# Altium PCB pcbxiao.PcbDoc (part 1 of 3)
Units mil, origin at the board's own origin, x right, y up, seen from the top; angles counter-clockwise.
Board outline 4666.32 x 1182.42 mil, 4 copper layers (Top Layer, Mid-Layer 1, Mid-Layer 2, Bottom Layer); 288 components, 144 nets, 734 pads, 278 vias.
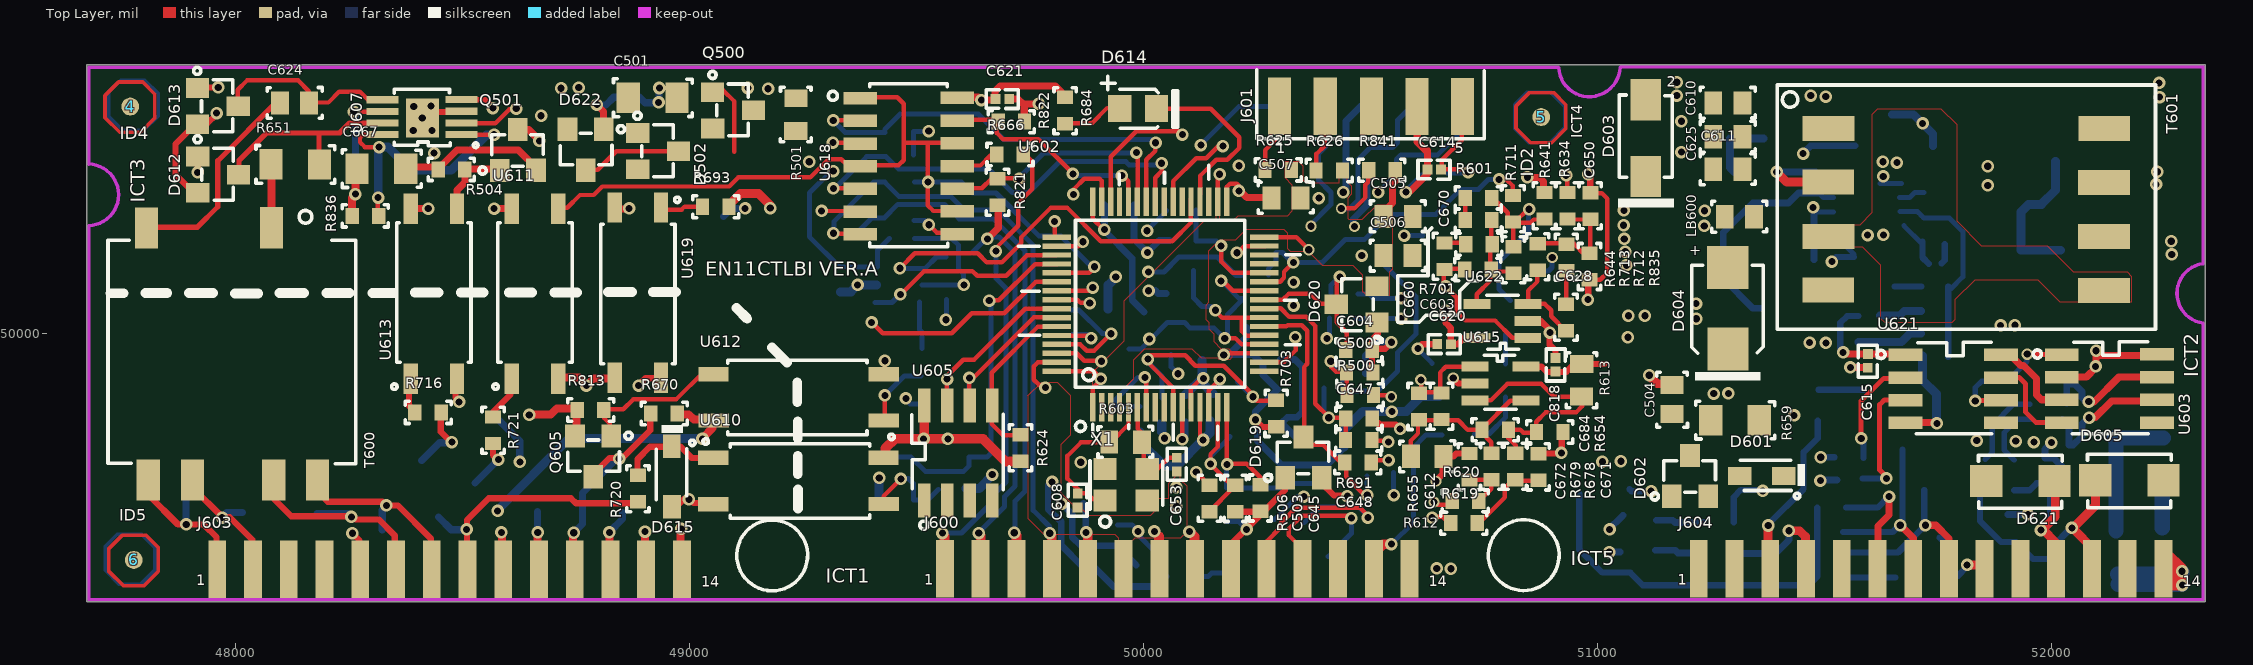
[diagram p0: Top Layer view]
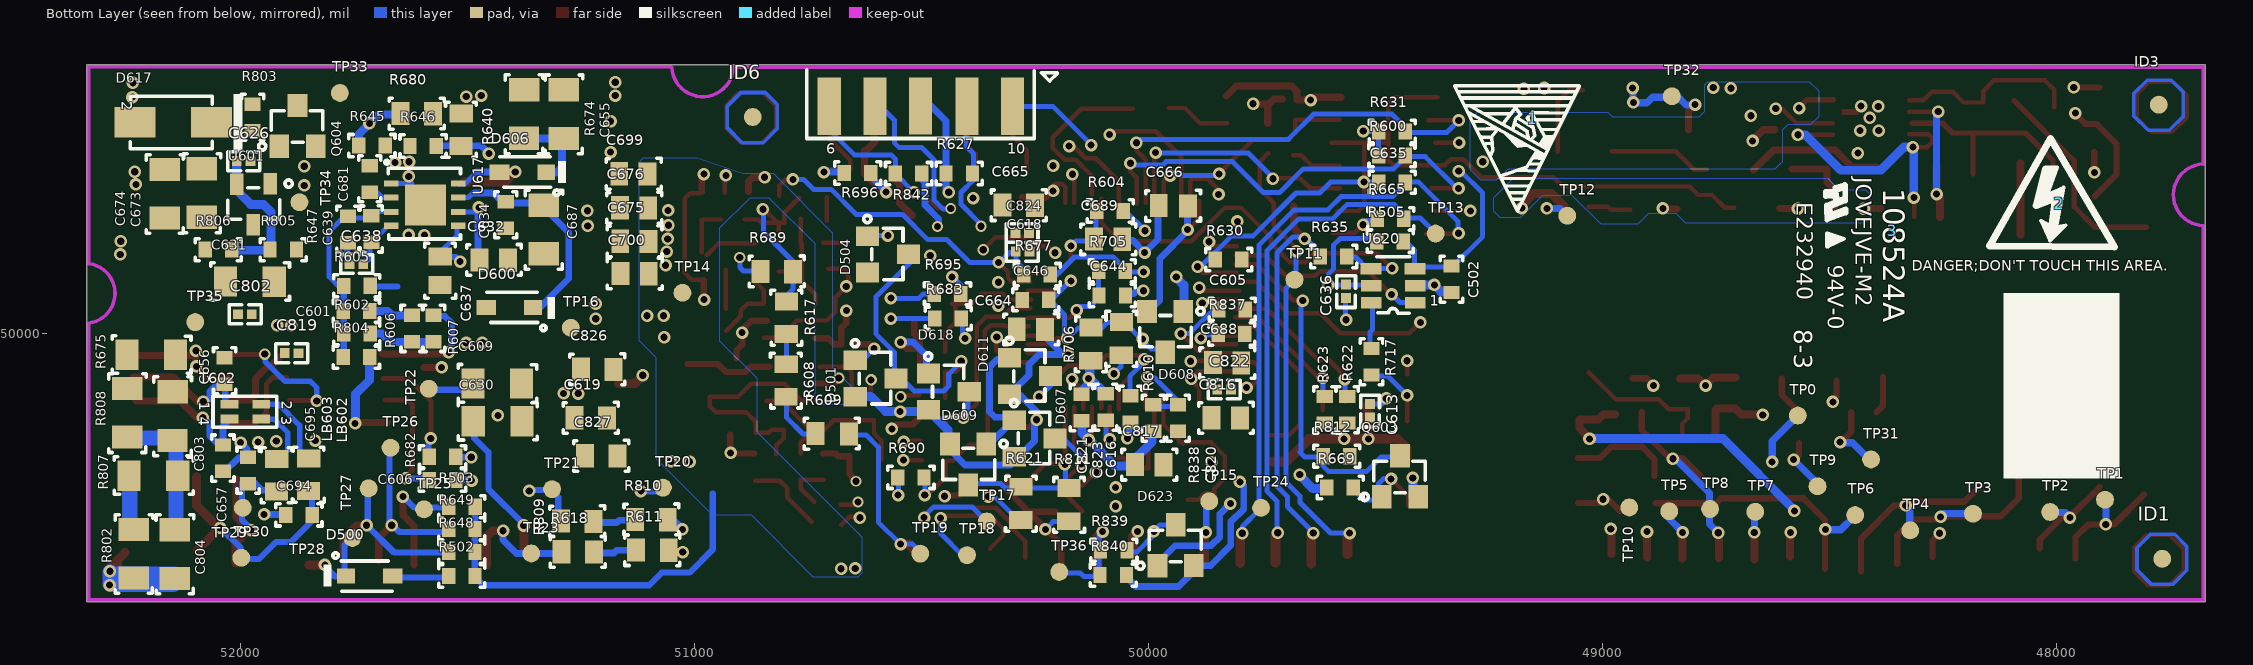
[diagram p1: Bottom Layer view, seen from below]
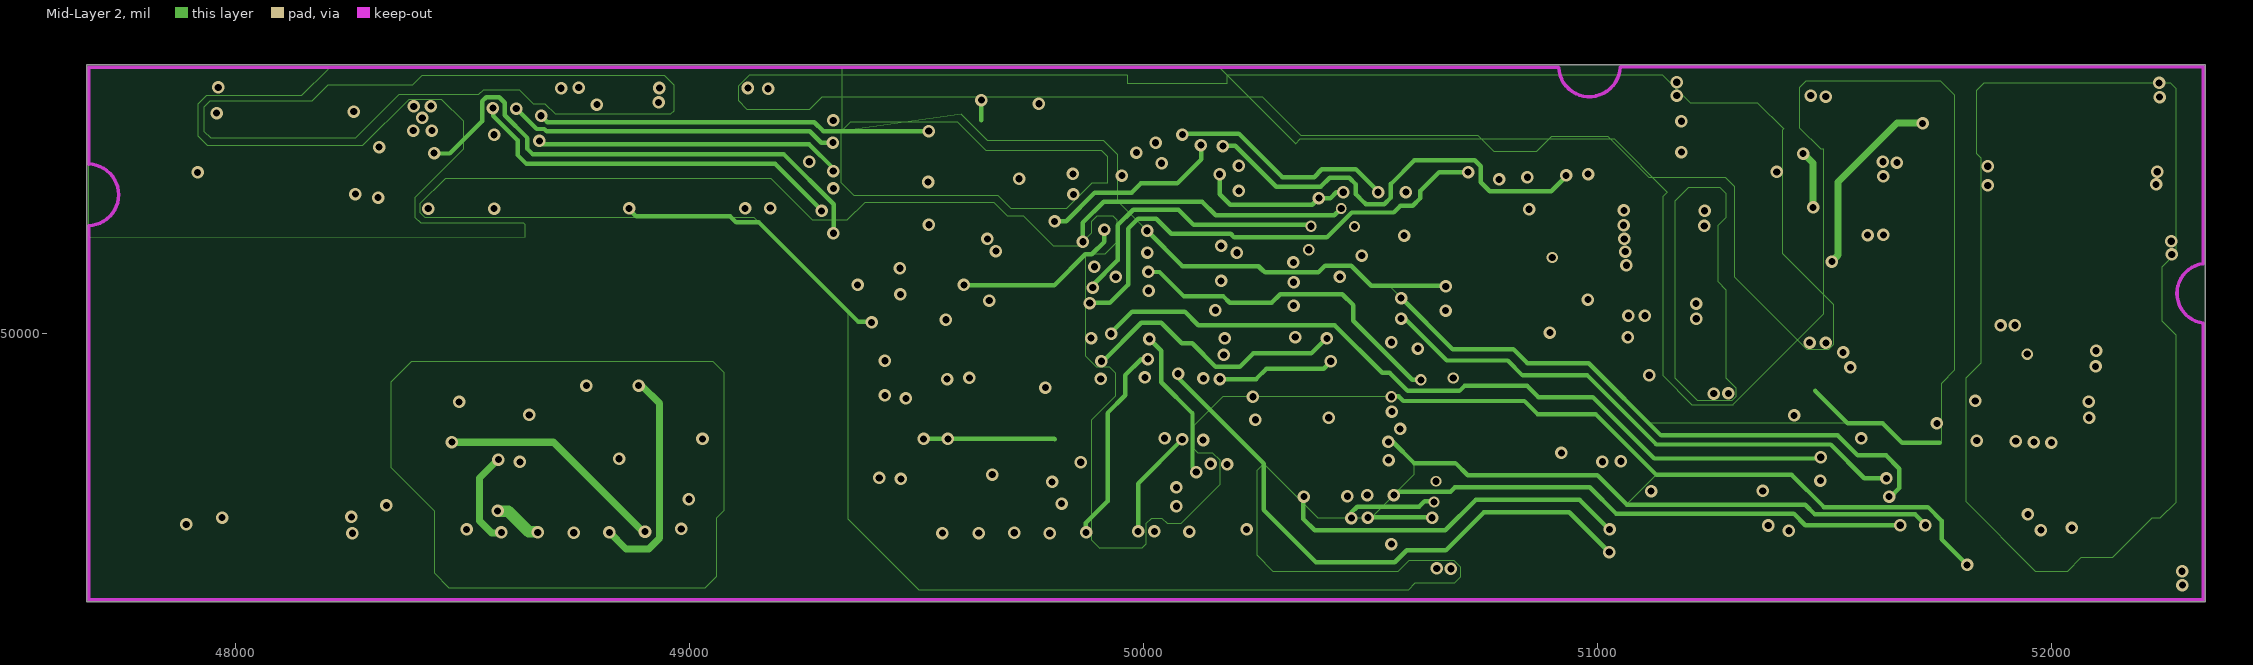
[diagram p2: Mid-Layer 2]

## Layer stack, top to bottom
Top Solder: solder mask 0.4, Solder Resist, Dk 3.5
Top Layer: signal copper 1.4
Dielectric 1: dielectric 12.6, FR-4, Dk 4.8
Mid-Layer 1: signal copper 1.4
Dielectric3: dielectric 12.6, FR-4, Dk 4.8
Mid-Layer 2: signal copper 1.4
Dielectric2: dielectric 12.6, FR-4, Dk 4.8
Bottom Layer: signal copper 1.4
Bottom Solder: solder mask 0.4, Solder Resist, Dk 3.5

## Board outline
47672.33,49408.87 52338.65,49408.87 52338.65,50591.29 47672.33,50591.29

## Design rules (kind name [scope] priority, off if disabled: settings)
AssemblyTestPointUsage [All] p0: scope1count=1 scope1_0_kind=Board scope1_0_value=Board scope2count=1 scope2_0_kind=Board scope2_0_value=Board commentlength=0
AssemblyTestpoint [All] p0: scope1count=1 scope1_0_kind=Board scope1_0_value=Board scope2count=1 scope2_0_kind=Board scope2_0_value=Board commentlength=0
Clearance [All] p0: scope1count=1 scope1_0_kind=Board scope1_0_value=Board scope2count=1 scope2_0_kind=Board scope2_0_value=Board commentlength=0 gap=12
Clearance [All] p1: gap=12 ignorepadtopadclearanceinfootprint=FALSE
ComponentClearance [All] p0: scope1count=1 scope1_0_kind=Board scope1_0_value=Board scope2count=1 scope2_0_kind=Board scope2_0_value=Board commentlength=0 gap=10 collisioncheckmode=3
DiffPairsRouting [All] p0: scope1count=1 scope1_0_kind=Board scope1_0_value=Board scope2count=1 scope2_0_kind=Board scope2_0_value=Board commentlength=0
FabricationTestPointUsage [All] p0: scope1count=1 scope1_0_kind=Board scope1_0_value=Board scope2count=1 scope2_0_kind=Board scope2_0_value=Board commentlength=0 valid=0 allowmultiple=FALSE
FabricationTestpoint [All] p0: scope1count=1 scope1_0_kind=Board scope1_0_value=Board scope2count=1 scope2_0_kind=Board scope2_0_value=Board commentlength=0 side=3 testpointundercomponent=TRUE minsize=40 maxsize=100 preferedsize=60 minholesize=0 maxholesize=40 preferedholesize=32 testpointgrid=1
FanoutControl Fanout_BGA [All] p0 off: scope1count=1 scope1_0_kind=Board scope1_0_value=Board scope2count=1 scope2_0_kind=Board scope2_0_value=Board commentlength=69 // Protel DXP Scope 1 Expression Was: IsBGA   Fanout_BGA (Default Rule)
FanoutControl Fanout_LCC [All] p0 off: scope1count=1 scope1_0_kind=Board scope1_0_value=Board scope2count=1 scope2_0_kind=Board scope2_0_value=Board commentlength=69 // Protel DXP Scope 1 Expression Was: IsLCC   Fanout_LCC (Default Rule)
FanoutControl Fanout_SOIC [All] p0 off: scope1count=1 scope1_0_kind=Board scope1_0_value=Board scope2count=1 scope2_0_kind=Board scope2_0_value=Board commentlength=71 // Protel DXP Scope 1 Expression Was: IsSOIC   Fanout_SOIC (Default Rule)
FanoutControl Fanout_Small [All] p0 off: scope1count=1 scope1_0_kind=Board scope1_0_value=Board scope2count=1 scope2_0_kind=Board scope2_0_value=Board commentlength=84 // Protel DXP Scope 1 Expression Was: (CompPinCount < 5)   Fanout_Small (Default Rule)
FanoutControl Fanout_Default [All] p0: scope1count=1 scope1_0_kind=Board scope1_0_value=Board scope2count=1 scope2_0_kind=Board scope2_0_value=Board commentlength=30 // Fanout_Default (Default Rule)
Height [All] p0: scope1count=1 scope1_0_kind=Board scope1_0_value=Board scope2count=1 scope2_0_kind=Board scope2_0_value=Board commentlength=0
HoleSize [All] p0: scope1count=1 scope1_0_kind=Board scope1_0_value=Board scope2count=1 scope2_0_kind=Board scope2_0_value=Board commentlength=0 absolutevalues=TRUE maxlimit=100 minlimit=1 maxpercent=80.000 minpercent=20.000
HoleToHoleClearance [All] p0: scope1count=1 scope1_0_kind=Board scope1_0_value=Board scope2count=1 scope2_0_kind=Board scope2_0_value=Board commentlength=0
LayerPairs [All] p0: scope1count=1 scope1_0_kind=Board scope1_0_value=Board scope2count=1 scope2_0_kind=Board scope2_0_value=Board commentlength=0 enforce=TRUE
MinimumSolderMaskSliver [All] p0: scope1count=1 scope1_0_kind=Board scope1_0_value=Board scope2count=1 scope2_0_kind=Board scope2_0_value=Board commentlength=0
NetAntennae [All] p0: scope1count=1 scope1_0_kind=Board scope1_0_value=Board scope2count=1 scope2_0_kind=Board scope2_0_value=Board commentlength=0
PasteMaskExpansion [All] p0: scope1count=1 scope1_0_kind=Board scope1_0_value=Board scope2count=1 scope2_0_kind=Board scope2_0_value=Board commentlength=0 expansion=0
PlaneClearance [All] p0: scope1count=1 scope1_0_kind=Board scope1_0_value=Board scope2count=1 scope2_0_kind=Board scope2_0_value=Board commentlength=0 clearance=20
PlaneConnect [All] p0: scope1count=1 scope1_0_kind=Board scope1_0_value=Board scope2count=1 scope2_0_kind=Board scope2_0_value=Board commentlength=0 planeconnectstyle=Relief reliefexpansion=20 reliefentries=4 reliefconductorwidth=10 reliefairgap=10
PolygonConnect [All] p0: scope1count=1 scope1_0_kind=Board scope1_0_value=Board scope2count=1 scope2_0_kind=Board scope2_0_value=Board commentlength=0 connectstyle=Direct reliefconductorwidth=10 reliefentries=4 polygonreliefangle="90 Angle"
PolygonConnect [All] p1: connectstyle=Direct reliefconductorwidth=10 reliefentries=4 polygonreliefangle="90 Angle" airgapwidth=10
RoutingCorners [All] p0: scope1count=1 scope1_0_kind=Board scope1_0_value=Board scope2count=1 scope2_0_kind=Board scope2_0_value=Board commentlength=0 cornerstyle=45-Degree minsetback=100 maxsetback=100
RoutingLayers [All] p0: scope1count=1 scope1_0_kind=Board scope1_0_value=Board scope2count=1 scope2_0_kind=Board scope2_0_value=Board commentlength=0 top layer=Automatic mid layer 1=Automatic mid layer 2=Automatic bottom layer=Automatic
RoutingLayers [All] p1: top layer_v5=TRUE mid layer 1_v5=FALSE mid layer 2_v5=FALSE bottom layer_v5=TRUE
RoutingPriority [All] p0: scope1count=1 scope1_0_kind=Board scope1_0_value=Board scope2count=1 scope2_0_kind=Board scope2_0_value=Board commentlength=0
RoutingTopology [All] p0: scope1count=1 scope1_0_kind=Board scope1_0_value=Board scope2count=1 scope2_0_kind=Board scope2_0_value=Board commentlength=0 topology=Shortest
RoutingVias [All] p0: scope1count=1 scope1_0_kind=Board scope1_0_value=Board scope2count=1 scope2_0_kind=Board scope2_0_value=Board commentlength=0 holewidth=28 width=50 viastyle="Through Hole" minholewidth=28 minwidth=50 maxholewidth=28 maxwidth=50
RoutingVias [All] p1: holewidth=28 width=50 viastyle="Through Hole" minholewidth=28 minwidth=50 maxholewidth=28 maxwidth=50
ShortCircuit [All] p0: scope1count=1 scope1_0_kind=Board scope1_0_value=Board scope2count=1 scope2_0_kind=Board scope2_0_value=Board commentlength=0 allowed=FALSE
SilkToBoardRegionClearance [All] p0: scope1count=1 scope1_0_kind=Board scope1_0_value=Board scope2count=1 scope2_0_kind=Board scope2_0_value=Board commentlength=0
SilkToSilkClearance [All] p0: scope1count=1 scope1_0_kind=Board scope1_0_value=Board scope2count=1 scope2_0_kind=Board scope2_0_value=Board commentlength=0
SilkToSolderMaskClearance [All] p0 off: scope1count=1 scope1_0_kind=Board scope1_0_value=Board scope2count=1 scope2_0_kind=Board scope2_0_value=Board commentlength=44 // Protel DXP Scope 1 Expression Was: IsPad
SolderMaskExpansion [All] p0: scope1count=1 scope1_0_kind=Board scope1_0_value=Board scope2count=1 scope2_0_kind=Board scope2_0_value=Board commentlength=0 expansion=2
SolderMaskExpansion [All] p1: expansion=2 istentingtop=FALSE
UnRoutedNet [All] p0: scope1count=1 scope1_0_kind=Board scope1_0_value=Board scope2count=1 scope2_0_kind=Board scope2_0_value=Board commentlength=0
UnpouredPolygon [All] p0: scope1count=1 scope1_0_kind=Board scope1_0_value=Board scope2count=1 scope2_0_kind=Board scope2_0_value=Board commentlength=0
Width [All] p0: scope1count=1 scope1_0_kind=Board scope1_0_value=Board scope2count=1 scope2_0_kind=Board scope2_0_value=Board commentlength=0 maxlimit=10 minlimit=10 preferedwidth=10
Width [All] p1: maxlimit=10 minlimit=10 preferedwidth=10
29 further rules are at their usual default settings.

## Components (designator, comment, footprint, x,y, rotation, side; value= is the part's Value field where it differs from the comment)
1 "NC" 27 49153.33,50472.5 r0 bottom
2 "NC" 28 47994.17,50285 r0 bottom
3 "NC" 29 48362,50226 r0 bottom
4 "NC" 30#1 47767.35,50495.91 r0 top
5 "NC" 30#2 50875.53,50472.73 r0 top
6 "NC" 30#3 47775.07,49497.16 r0 top
C500 "10NF" 33 50442.73,49914.47 r90 top
C501 "10UF" 4 48870.61,50523.64 r90 top
C502 "NC" 33 49333.33,50085.42 r0 bottom
C503 "22NF" 33 50202.88,49669.24 r0 top
C504 "1UF" 3 51171.48,49888.22 r0 top
C505 "NC" 3 50595.12,50250.3 r270 top
C506 "10UF" 3 50594.7,50164.05 r270 top
C507 "NC" 3 50348.03,50291.14 r270 top
C601 "22NF" 33 51777.92,50050 r90 bottom
C603 "NC" 33 50703.03,50141.14 r90 top
C604 "2.2NF" 33 50441.48,49964.05 r90 top
C605 "41PF" 33 49782.42,50051.92 r270 bottom
C606 "41PF" 33 51588.33,49677.5 r90 bottom
C608 "22PF" 14#1 49857.31,49641.14 r0 top
C609 "10UF" 4 51482.69,49894.47 r90 bottom
C610 "1UF" 3 51321.33,50500.27 r270 top
C611 "1UF" 3 51321.33,50354.43 r270 top
C612 "33PF" 33 50657.2,49872.8 r0 top
C613 "100NF" 14#2 49514.58,49819.67 r180 bottom
C614 "100NF" 14#1 50630.95,50363.22 r90 top
C615 "100NF" 14#1 51593.15,49929.47 r180 top
C616 "1UF" 33 50040.42,49799.58 r0 bottom
C618 "100NF" 14#2 50286.67,50182.08 r270 bottom
C619 "1UF" 32#1 51261.67,49805.83 r90 bottom
C620 "NC" 14#1 50671.78,49973.64 r270 top
C621 "100NF" 14#1 49679.61,50518.64 r90 top
C624 "2.2UF" 3 48095.61,50514.47 r90 top
C625 "1UF" 3 51321.33,50425.68 r270 top
C626 "100NF" 14#2 51983.83,50376.67 r90 bottom
C628 "10NF" 33 50931.78,50068.64 r0 top
C630 "10UF" 4 51481.86,49811.14 r90 bottom
C631 "10UF" 4 52027.69,50119.05 r90 bottom
C632 "1UF" 32#2 51474.75,50153.75 r90 bottom
C634 "100NF" 33 51415,50294.17 r180 bottom
C635 "10NF" 33 49430,50331.67 r270 bottom
C636 "100NF" 14#2 49567.5,50082.92 r180 bottom
C637 "330NF" 32#2 51567.92,50170.58 r180 bottom
C638 "33NF" 14#2 51735.42,50150 r90 bottom
C639 "2.2NF" 33 51711.25,50262.92 r180 bottom
C644 "22NF" 33 50046.25,50082.5 r270 bottom
C645 "22NF" 33 50258.15,49670.3 r0 top
C646 "10NF" 33 50215,50072.92 r270 bottom
C647 "22NF" 33 50441.48,49813.22 r90 top
C648 "22NF" 33 50438.98,49716.14 r90 top
C650 "100NF" 33 50985.12,50314.05 r0 top
C653 "22PF" 14#1 50075.65,49720.3 r0 top
C655 "1NF" 4 51283.03,50530.8 r180 bottom
C656 "10PF" 33 52034.17,49950.83 r180 bottom
C657 "10PF" 33 52038.12,49758.33 r180 bottom
C660 "2.2NF" 33 50662.2,50136.14 r180 top
C664 "2.2UF" 32#2 50291.67,50001.08 r90 bottom
C665 "2.2UF" 32#1 50318.75,50274.58 r90 bottom
C666 "2.2UF" 32#3 49978.92,50273.33 r90 bottom
C667 "10UF" 4 48273.11,50367.39 r90 top
C670 "10NF" 33 50704.28,50250.72 r90 top
C671 "10NF" 33 50870.53,49738.64 r0 top
C672 "10NF" 33 50718.87,49739.47 r0 top
C673 "10UF" 4 52080.53,50357.05 r180 bottom
C674 "10UF" 4 52161.78,50355.38 r180 bottom
C675 "10UF" 32#2 51165.17,50194.58 r90 bottom
C676 "10UF" 32#2 51166,50268.75 r90 bottom
C681 "420PF" 33 51714.58,50373.33 r180 bottom
C684 "10NF" 33 50741.21,49788.22 r90 top
C687 "10UF" 4 51326.78,50276.63 r180 bottom
C688 "2.2UF" 32#2 49859.75,49927.5 r90 bottom
C689 "330NF" 32#2 50121.83,50199.58 r90 bottom
C694 "180PF" 33 51904.58,49600.83 r90 bottom
C695 "180PF" 33 51982.5,49731.67 r180 bottom
C699 "10UF" 32#2 51167.25,50343.33 r90 bottom
C700 "10UF" 32#2 51164.75,50123.75 r90 bottom
C802 "100NF" 14#2 51980.83,50039.58 r90 bottom
C803 "4.2NF" 4 52144.83,49865.67 r180 bottom
C804 "4.2NF" 4 52140.11,49561.63 r180 bottom
C816 "10UF" 32#2 49862.25,49805.83 r90 bottom
C817 "10UF" 32#2 50031.25,49702.92 r90 bottom
C818 "100NF" 14#1 50905.12,49921.14 r180 top
C819 "100NF" 14#2 51877.92,49953.75 r90 bottom
C820 "100NF" 33 49935.83,49779.58 r0 bottom
C821 "10NF" 33 50148.33,49802.92 r0 bottom
C822 "100NF" 14#2 49823.75,49873.75 r90 bottom
C823 "4.7NF" 33 50095,49804.17 r0 bottom
C824 "100NF" 14#2 50287.5,50223.33 r270 bottom
C826 "1UF" 32#1 51247.08,49912.92 r90 bottom
C827 "1UF" 32#1 51238.75,49722.5 r90 bottom
D500 "LBAS20HT1G(JR)" 18#1 51771.67,49467.08 r270 bottom
D501 "BAV99（A7）" 31#1 50558,49909 r90 bottom
D502 "BZX84C6V8(Z5)" 31#2 48973.79,50409.89 r270 top
D504 "NC" 31#1 50530.83,50182.5 r90 bottom
D600 "LBAS20HT1G(JR)" 18#1 51352.08,50055 r90 bottom
D601 "LBAS20HT1G(JR)" 18#2 51420.65,49684.85 r270 top
D602 "BAV99（A7）" 31#2 51195.23,49729.06 r0 top
D603 "SS510A" 16 51110.53,50511.14 r0 top
D604 "EF240" 17 51286.9,50122.8 r0 top
D605 "SMAJ220A(GE)" 19 52108.26,49684.62 r90 top
D606 "LBAS20HT1G(JR)" 18#1 51323,50352.92 r90 bottom
D607 "BAV99（A7）" 31#1 50207.83,49777.08 r90 bottom
D608 "BAV99（A7）" 31#1 49954.67,49960 r180 bottom
D609 "BAV99（A7）" 31#1 50388.33,49667.92 r180 bottom
D611 "BAV99（A7）" 31#1 50217.92,49914.58 r90 bottom
D612 "BAV99（A7）" 31#2 48004.77,50358.22 r270 top
D613 "BAV99（A7）" 31#2 48004,50509 r270 top
D614 "LED绿色" 10 50028.56,50491.33 r0 top
D615 "SD103BW（S5）" 18#3 48962.69,49739.47 r0 top
D617 "SS510A" 16 52229.58,50468.75 r90 bottom
D618 "BAV99（A7）" 31#1 50396.67,49880 r90 bottom
D619 "BAV99（A7）" 31#2 50343.56,49769.89 r0 top
D620 "BAV99（A7）" 31#2 50426.48,50054.89 r90 top
D621 "SMAJ220A(GE)" 19 51868.15,49682.8 r90 top
D622 "NC" 31#2 48779.85,50361.14 r180 top
D623 "BAV99（A7）" 31#1 49948.75,49576.25 r0 bottom
ID1 "MARK" 30#4 47767.5,49499.58 r0 bottom
ID3 "MARK" 30#4 47775,50500 r0 bottom
ID6 "MARK" 30#4 50872.5,50472.92 r0 bottom
J600 "14P单排针" 21 49560.69,49478.64 r0 top
J601 "NC" 25 50302.73,50496.14 r0 top
J603 "14P单排针" 21 47957.8,49477.8 r0 top
J604 "14P单排针" 21 51221.29,49478.64 r0 top
LB600 "680NH" 3 51346.78,50249.47 r270 top
LB602 "680NH" 32#1 51857.88,49721.29 r180 bottom
LB603 "680NH" 32#1 51928.33,49720.42 r180 bottom
Q500 "MMBT4401(2X)" 31#2 49138.94,50499.89 r270 top
Q501 "NC" 31#2 48613.11,50446.97 r0 top
Q603 "MMBT4401(2X)" 31#1 49454.75,49728.12 r0 bottom
Q604 "MMBT4401(2X)" 31#1 51883.33,50500 r0 bottom
Q605 "MMBT4401(2X)" 31#2 48796.44,49685.72 r180 top
R500 "30.1K±1%" 33 50443.98,49864.89 r90 top
R501 "1.5K" 32#1 49226.44,50514.89 r0 top
R502 "220K" 33 51546.25,49466.25 r90 bottom
R503 "30.1K±1%" 33 51545.83,49618.75 r90 bottom
R504 "NC" 33 48441.86,50361.97 r90 top
R505 "NC" 33 49434.08,50201.67 r270 bottom
R506 "1.96K±1%" 33 50146.48,49669.47 r0 top
R600 "5.1K" 33 49430.42,50390.42 r270 bottom
R601 "0R" 33 50704.28,50299.05 r90 top
R602 "3.3K" 33 51777.08,50000 r90 bottom
R603 "NC" 32#1 49927.31,49752.8 r90 top
R604 "NC" 33 50050.83,50268.33 r270 bottom
R605 "10K" 33 51777.5,50105.42 r90 bottom
R606 "402R±1%" 33 51621.25,50043.75 r180 bottom
R607 "0R" 33 51574.25,50043.75 r180 bottom
R608 "24K" 32#1 50790.83,49862.92 r0 bottom
R609 "24K" 32#4 50664.42,49786.25 r270 bottom
R610 "3.32K" 32#4 50067.5,50020.58 r180 bottom
R611 "10K" 32#1 51125.83,49514.58 r90 bottom
R612 "2.2M" 32#1 50592.2,49721.14 r90 top
R613 "2.2M" 32#1 50972.62,49863.64 r180 top
R617 "3.9K" 32#1 50790,50001.25 r0 bottom
R618 "91K" 32#1 51290.42,49510.83 r90 bottom
R619 "1K" 33 50672.31,49582.8 r90 top
R620 "1K" 33 50675.95,49631.14 r90 top
R621 "3.32K" 32#4 50288.75,49657.67 r180 bottom
R622 "10K" 33 49562.92,49797.92 r0 bottom
R623 "10K" 33 49612.5,49797.92 r0 bottom
R624 "10K" 33 49729.81,49780.72 r0 top
R625 "10K" 33 50263.26,50360.91 r90 top
R626 "10K" 33 50375.65,50359.47 r90 top
R627 "10K" 33 50383.33,50351.25 r270 bottom
R630 "10K" 33 49790,50161.25 r270 bottom
R631 "5.1K" 33 49430,50443.75 r270 bottom
R634 "150K±0.5%" 33 50934.7,50314.47 r0 top
R635 "10K" 33 49558.75,50168.33 r270 bottom
R640 "240K" 32#1 51506.67,50415.42 r0 bottom
R641 "150K±1%" 33 50883.87,50314.47 r0 top
R644 "150K±0.5%" 33 50815.53,50194.89 r0 top
R645 "9K" 33 51743.75,50414.17 r90 bottom
R646 "1.96K±1%" 33 51631.25,50413.33 r90 bottom
R647 "150K±0.5%" 33 51762.92,50262.5 r180 bottom
R648 "4.02M±1%" 33 51546.25,49519.17 r90 bottom
R649 "30.1K±1%" 33 51546.25,49570 r90 bottom
R651 "2.2R" 4 48083.11,50376.97 r90 top
R654 "220K" 33 50861.37,49783.64 r90 top
R655 "220K" 33 50608.03,49871.97 r0 top
R659 "0R" 4 51254.96,49813.22 r90 top
R665 "10.5R±1%" 33 49433.08,50251.42 r270 bottom
R666 "10.5R±1%" 33 49672.73,50394.89 r90 top
R669 "1.5K±1%" 33 49544.17,49659.17 r270 bottom
R670 "1.5K±1%" 33 48977.27,49822.39 r270 top
R674 "51K" 4 51370.53,50531.21 r180 bottom
R675 "1.62M" 4 52244.77,49957.8 r90 bottom
R677 "1K" 33 50212.08,50128.33 r270 bottom
R678 "1.10K±1%" 33 50819.7,49740.3 r0 top
R679 "1.10K±1%" 33 50767.2,49740.3 r0 top
R680 "240K" 32#1 51579.17,50491.67 r270 bottom
R682 "1K" 33 51588.33,49728.75 r90 bottom
R683 "1K" 33 50407.92,50031.92 r270 bottom
R684 "10K" 33 49826.48,50456.97 r180 top
R689 "2K" 32#1 50852.08,50128.33 r90 bottom
R690 "30.1K±1%" 33 50490.08,49681.75 r270 bottom
R691 "30.1K±1%" 33 50440.65,49766.14 r90 top
R693 "1K" 33 49024.24,50279.47 r90 top
R695 "30.1K±1%" 33 50409.58,50086.08 r270 bottom
R696 "1.96K±1%" 33 50607.08,50352.08 r270 bottom
R701 "90.9K±1%" 33 50705.53,50196.97 r90 top
R703 "1.96K±1%" 33 50293.15,49856.55 r0 top
R705 "100R±1%" 33 50046.67,50136.67 r270 bottom
R706 "4.02K" 32#4 50134.58,50008.5 r180 bottom
R711 "825K±1%" 33 50815.12,50307.8 r0 top
R712 "0R" 33 50932.2,50200.3 r0 top
R713 "6.8K" 33 50869.28,50201.55 r0 top
R716 "NC" 33 48457.27,49824.89 r270 top
R717 "402R±1%" 33 49509.58,49903.75 r0 bottom
R720 "402R±1%" 33 48885.19,49624.47 r180 top
R721 "1K" 33 48566.44,49752.8 r180 top
R802 "1.62M" 4 52230.11,49562.46 r180 bottom
R803 "402R±1%" 33 51972.5,50508.75 r180 bottom
R804 "NC" 33 51777.92,49948.33 r90 bottom
R805 "10K" 33 51939.58,50185 r90 bottom
R806 "10K" 33 52082.5,50185 r90 bottom
R807 "1.62M" 4 52240.19,49691.14 r90 bottom
R808 "1.62M" 4 52244.28,49872.88 r180 bottom
R809 "91K" 32#1 51291.67,49578.33 r90 bottom
R810 "10K" 32#1 51127.92,49582.08 r90 bottom
R811 "4.02K" 32#4 50182.92,49654.75 r180 bottom
R812 "1.5K±1%" 33 49552.5,49728.33 r270 bottom
R813 "1.5K±1%" 33 48815.19,49830.3 r270 top
R821 "5.1K" 33 49677.31,50277.8 r180 top
R822 "5.1K" 33 49675.23,50466.97 r90 top
R835 "825K±0.5%" 33 50983.45,50180.3 r0 top
R836 "0R" 33 48252.27,50259.47 r90 top
R837 "10K" 33 49783.75,49997.5 r270 bottom
R838 "5.1K" 33 49990.42,49779.58 r0 bottom
R839 "10K" 33 50042.92,49521.25 r270 bottom
R840 "1.96K±1%" 33 50044.17,49466.25 r270 bottom
R841 "10K" 33 50491.9,50359.89 r90 top
R842 "10K" 33 50495.42,50350.83 r270 bottom
T600 "SMD09H1722R" 2 48078.11,50232.8 r0 top
T601 "EFD12-390-A" 20 51527.96,50448.64 r0 top
T602 "SDCW2012-2-900TF" 24 51961.25,49840 r90 bottom
TP0 "TP" 35 48563.75,49812.08 r0 bottom
TP1 "TP" 35 47887.08,49626.67 r0 bottom
TP2 "TP" 35 48007.92,49599.58 r0 bottom
TP3 "TP" 35 48177.92,49595.83 r0 bottom
TP4 "TP" 35 48316.25,49559.17 r0 bottom
TP5 "TP" 35 48847.08,49601.25 r0 bottom
TP6 "TP" 35 48437.5,49592.92 r0 bottom
TP7 "TP" 35 48657.5,49600 r0 bottom
TP8 "TP" 35 48757.08,49606.25 r0 bottom
TP9 "TP" 35 48520.42,49656.25 r0 bottom
TP10 "TP" 35 48935,49609.58 r0 bottom
TP11 "TP" 35 49672.5,50111.25 r0 bottom
TP12 "TP" 35 49071.67,50252.08 r0 bottom
TP13 "TP" 35 49361.67,50212.92 r0 bottom
TP14 "TP" 35 51020.83,50082.5 r0 bottom
TP15 "TP" 35 49860.42,49623.33 r0 bottom
TP16 "TP" 35 51266.67,50005.42 r0 bottom
TP17 "TP" 35 50350.42,49578.75 r0 bottom
TP18 "TP" 35 50393.75,49504.58 r0 bottom
TP19 "TP" 35 50497.08,49507.92 r0 bottom
TP20 "TP" 35 51063.75,49653.33 r0 bottom
TP21 "TP" 35 51307.92,49650 r0 bottom
TP22 "TP" 35 51579.58,49871.25 r0 bottom
TP23 "TP" 35 51353.75,49508.33 r0 bottom
TP24 "TP" 35 49746.25,49608.75 r0 bottom
TP25 "TP" 35 51590,49605.42 r0 bottom
TP26 "TP" 35 51663.75,49741.25 r0 bottom
TP27 "TP" 35 51712.08,49651.67 r0 bottom
TP28 "TP" 35 51747.92,49542.5 r0 bottom
TP29 "TP" 35 51989.17,49608.75 r0 bottom
TP30 "TP" 35 51992.5,49498.75 r0 bottom
TP31 "TP" 35 48402.5,49715.42 r0 bottom
TP32 "TP" 35 48841.25,50515.42 r0 bottom
TP33 "TP" 35 51775.42,50522.71 r0 bottom
TP34 "TP" 35 51864.58,50282.08 r0 bottom
TP35 "TP" 35 52094.17,50017.92 r0 bottom
TP36 "TP" 35 50190.83,49467.5 r0 bottom
U601 "TL431BQDBZR(CJW)" 31#3 51963.33,50241.25 r180 bottom
U602 "STM32F332R8T6" 11 49889.74,49836.55 r0 top
U603 "TJA1051" 12 52028.98,49949.89 r0 top
U605 "M24256-BWMN6TP(42568WP)" 12 49520.65,49637.39 r90 top
U607 "UCC27324DGNR（27324）" 6 48499.36,50438.64 r180 top
U610 "EL1018" 7 49426.33,49728.64 r270 top
U611 "EL1018" 7 48605.53,50273.22 r0 top
U612 "EL1018" 7 49054.05,49804.7 r90 top
U613 "NC" 7 48382.58,50273.22 r0 top
U615 "TP5551-TR(E51TKJ)" 15 50735.53,49926.14 r0 top
U617 "AAOGAJ" 23 51665,50328.75 r0 bottom
U618 "74LVC08AD" 9 49393.08,50519.67 r0 top
U619 "EL1018" 7 48940.08,49903.22 r180 top
U620 "74LVC2G04GV" 26 49514.25,50145.33 r0 bottom
U621 "NSI8121N0" 12 51684.81,49949.05 r0 top
U622 "TS951ILT(K101)" 15 50841.37,49989.89 r180 top
X1 "T120（12.00MHz)" 13 49918.56,49629.47 r0 top

## Footprints (in the part's own frame and the unit in brackets; to place one, negate y for a bottom-side part, rotate by r counter-clockwise, add the part's x,y. Pads: shape width x height; smd on the part's side, far side on the other; paste and mask are expansions set on the pad)
2 [mm]
  rect 1.3x2.3 smd: 1(0.021,-0.011) 2(-6.964,-0.032) 3(-6.869,-14.133) 4(-4.403,-14.127) 5(0.148,-14.133) 6(2.603,-14.129)
  silkscreen extent -9.12,-13.22 4.74,0.96
3 [mm]
  rect 1.3x1 smd: 1(-0.18,-1.683) 2(-0.18,-0.053)
  silkscreen extent -1.05,-2.42 0.68,0.66
4 [mm]
  rect 1.7x1.3 smd: 1(-0.131,-2.582) 2(-0.127,0.138)
  silkscreen extent -1.17,-3.44 0.93,0.97
6 [mm]
  rect 1.8x0.4 smd: 1(0.053,0.021) 2(0.053,-0.629) 3(0.053,-1.279) 4(0.053,-1.929) 5(4.456,-1.925) 6(4.456,-1.275) 7(4.456,-0.625) 8(4.456,0.025)
  rect 1.85x2.2 smd: 1(2.238,-0.906)
  silkscreen extent -0.88,-2.51 3.82,0.75
7 [mm]
  rect 0.8x1.7 smd: 1(0.076,-9.493) 2(2.667,-9.493) 3(2.665,0.032) 4(0.078,0.025)
  silkscreen extent -0.99,-10.08 3.46,-0.76
9 [mm]
  rect 1.85x0.7 smd: 1(-0.434,-0.042) 2(-0.434,-1.312) 3(-0.434,-2.582) 4(-0.434,-3.852) 5(-0.434,-5.122) 6(-0.434,-6.392) 7(-0.434,-7.662) 8(4.995,-7.652) 9(4.995,-6.382) 10(4.995,-5.112) 11(4.995,-3.842) 12(4.995,-2.572) 13(4.995,-1.302) 14(4.995,-0.032)
  silkscreen extent -2.22,-8.35 4.47,0.77
10 [mm]
  rect 1.3x1.5 smd: 1(0,0.091) 2(-2.053,0.101)
  silkscreen extent -3.1,-1.02 1.2,1.9
11 [mm]
  rect 0.3x1.6 smd: 1(-0.04,0.005) 2(0.46,0.005) 3(0.96,0.005) 4(1.46,0.005) 5(1.96,0.005) 6(2.46,0.005) 7(2.96,0.005) 8(3.46,0.005) 9(3.96,0.005) 10(4.46,0.005) 11(4.96,0.005) 12(5.46,0.005) 13(5.96,0.005) 14(6.46,0.005) 15(6.96,0.005) 16(7.46,0.005) 33(7.46,11.509) 34(6.96,11.509) 35(6.46,11.509) 36(5.96,11.509) 37(5.46,11.509) 38(4.96,11.509) 39(4.46,11.509) 40(3.96,11.509) 41(3.46,11.509) 42(2.96,11.509) 43(2.46,11.509) 44(1.96,11.509) 45(1.46,11.509) 46(0.96,11.509) 47(0.46,11.509) 48(-0.04,11.509)
  rect 1.6x0.3 smd: 17(9.546,2.034) 18(9.546,2.534) 19(9.546,3.034) 20(9.546,3.534) 21(9.546,4.034) 22(9.546,4.534) 23(9.546,5.034) 24(9.546,5.534) 25(9.546,6.034) 26(9.546,6.534) 27(9.546,7.034) 28(9.546,7.534) 29(9.546,8.034) 30(9.546,8.534) 31(9.546,9.034) 32(9.546,9.534) 49(-2.064,9.528) 50(-2.064,9.028) 51(-2.064,8.528) 52(-2.064,8.028) 53(-2.064,7.528) 54(-2.064,7.028) 55(-2.064,6.528) 56(-2.064,6.028) 57(-2.064,5.528) 58(-2.064,5.028) 59(-2.064,4.528) 60(-2.064,4.028) 61(-2.064,3.528) 62(-2.064,3.028) 63(-2.064,2.528) 64(-2.064,2.028)
  silkscreen extent -4.22,-1.83 11.58,13.55
12 [mm]
  rect 1.9x0.7 smd: 1(-0.159,0.085) 2(-0.159,-1.185) 3(-0.159,-2.455) 4(-0.159,-3.725) 5(5.175,-3.724) 6(5.175,-2.454) 7(5.175,-1.184) 8(5.175,0.086)
  silkscreen extent -1.75,-4.34 4.68,0.79
13 [mm]
  rect 1.3x1.25 smd: 1(-0.09,0.058) 2(-0.09,1.815) 3(2.28,1.814) 4(2.281,0.058)
  silkscreen extent -0.93,-1.43 3.14,2.29
14#1 [mm]
  rect 0.55x0.55 smd: 1(-0.064,-0.626) 2(-0.058,0.141)
  silkscreen extent -0.6,-1.12 0.46,0.67
14#2 [mm]
  rect 0.55x0.55 smd: 1(0.064,0.626) 2(0.058,-0.141)
  silkscreen extent -0.46,-0.67 0.6,1.12
15 [mm]
  rect 1.5x0.55 smd: 1(-0.132,0.015) 2(-0.132,-0.942) 3(-0.137,-1.894) 4(2.714,-1.894) 5(2.715,0.016)
  silkscreen extent 0.39,-2.39 2.16,0.65
16 [mm]
  rect 1.7x2.3 smd: 1(-0.1,-4.202) 2(-0.095,0.085)
  silkscreen extent -1.65,-5.95 1.48,0.35
17 [mm]
  rect 2.3x2.4 smd: 1(0,0.572) 2(0.011,-4)
  silkscreen extent -2.01,-5.77 1.98,0.69
18#1 [mm]
  rect 0.85x1 smd: 1(0.047,0.091)
  rect 0.85x1.1 smd: 2(0.042,2.709)
  silkscreen extent -1.25,-1.15 0.91,2.69
18#2 [mm]
  rect 1x1.3 smd: 1(-0.025,-0.26) 2(-0.011,-2.72)
  silkscreen extent -0.91,-2.69 1.25,0.94
18#3 [mm]
  rect 1x1.3 smd: 1(-0.047,0.29) 2(-0.042,-3.09)
  silkscreen extent -0.91,-2.69 1.25,1.48
19 [mm]
  rect 1.8x1.8 smd: 1(-0.21,-3.514) 2(-0.214,0.296)
  silkscreen extent -1.74,-3.95 1.23,0.73
20 [mm]
  rect 2.9x1.4 smd: 1(-0.487,0.074) 2(-0.497,-2.942) 3(-0.492,-5.969) 4(-0.497,-8.975) 5(14.933,-8.994) 6(14.939,-5.988) 7(14.933,-2.961) 8(14.944,0.055)
  silkscreen extent -3.36,-11.18 17.81,2.5
21 [mm]
  rect 1x3.2 smd: 1(0.045,0.064) 2(2.045,0.064) 3(4.045,0.064) 4(6.045,0.064) 5(8.045,0.064) 6(10.045,0.064) 7(12.045,0.064) 8(14.045,0.064) 9(16.045,0.064) 10(18.045,0.064) 11(20.045,0.064) 12(22.045,0.064) 13(24.045,0.064) 14(26.045,0.064)
23 [mm]
  rect 0.8x0.35 smd: 1(-3.672,-0.031) 1(0.074,-0.032) 2(-3.672,0.752) 2(0.074,0.751) 3(-3.672,1.567) 3(0.074,1.566) 4(-3.672,2.34) 4(0.074,2.339)
  rect 2.3x2.3 smd: 6(-1.831,1.164)
  silkscreen extent -3.79,-1.32 0.43,3.07
24 [mm]
  rect 0.5x1 smd: 1(0.092,1.603) 2(0.091,-0.169) 3(-0.744,-0.169) 4(-0.744,1.603)
  silkscreen extent -1.19,-1.03 0.55,2.53
25 [mm]
  rect 1.3x3.2 smd: 1(-0.085,0.095) 2(2.476,0.095) 3(5.069,0.1) 4(7.62,0.094) 5(10.16,0.094)
  rect 1.3x3.2 smd far side: 6(10.171,0.106) 7(7.609,0.106) 8(5.064,0.111) 9(2.466,0.105) 10(-0.074,0.105)
  silkscreen extent -1.34,-1.71 11.38,2.13
26 [mm]
  rect 1.16x0.65 smd: 1(-2.582,1.979) 2(-2.582,1.042) 3(-2.572,0.089) 4(-0.116,0.084) 5(-0.127,1.037) 6(-0.127,1.974)
  silkscreen extent -2.27,-0.58 -0.43,2.56
27 [mil]
  silkscreen extent -102,-72 172,203
28 [mil]
  silkscreen extent -122,-144 153,95
29 [mil]
  silkscreen extent 102,-101 146,36
30#1 [mm]
  round 1 smd: 2(0.016,0.09)
  Top Layer lines w0.2: -0.64,1.461 -1.397,0.705 -1.397,-0.528 -0.582,-1.343 0.604,-1.343 1.392,-0.555 1.392,0.784 0.715,1.461 -0.613,1.461
30#2 [mm]
  round 1 smd: 1(0.016,0.09)
  Top Layer lines w0.2: -0.64,1.461 -1.397,0.705 -1.397,-0.528 -0.582,-1.343 0.604,-1.343 1.392,-0.555 1.392,0.784 0.715,1.461 -0.613,1.461
30#3 [mm]
  round 1 smd: 3(0.016,0.09)
  Top Layer lines w0.2: -0.64,1.461 -1.397,0.705 -1.397,-0.528 -0.582,-1.343 0.604,-1.343 1.392,-0.555 1.392,0.784 0.715,1.461 -0.613,1.461
30#4 [mm]
  round 1 smd: 1(-0.016,-0.09)
  Top Layer lines w0.2: 0.613,-1.461 -0.715,-1.461 -1.392,-0.784 -1.392,0.555 -0.604,1.343 0.582,1.343 1.397,0.528 1.397,-0.705 0.64,-1.461
31#1 [mm]
  rect 1.1x1.3 smd: 1(0.794,2.238) 2(-1.238,2.237) 3(-0.222,-0.048)
  silkscreen extent -1.65,0.25 1.96,2.45
31#2 [mm]
  rect 1.1x1.3 smd: 1(-0.794,-2.238) 2(1.238,-2.237) 3(0.222,0.048)
  silkscreen extent -1.96,-2.45 1.65,-0.25
31#3 [mm]
  rect 0.75x1.2 smd: 1(0.73,2.238) 2(-1.143,2.206) 3(-0.222,-0.048)
  silkscreen extent -1.65,0.25 1.96,2.45
32#1 [mm]
  rect 1.3x1 smd: 1(0.185,-1.752) 2(0.201,0.069)
  silkscreen extent -0.67,-2.37 1.06,0.7
32#2 [mm]
  rect 1.3x1 smd: 1(0.185,-1.625) 2(0.201,-0.037)
  silkscreen extent -0.67,-2.37 1.06,0.7
32#3 [mm]
  rect 1.3x1 smd: 1(0.185,-1.677) 2(0.201,-0.037)
  silkscreen extent -0.67,-2.37 1.06,0.7
32#4 [mm]
  rect 1.3x1 smd: 1(0.185,-1.752) 2(0.201,0.111)
  silkscreen extent -0.67,-2.37 1.06,0.7
33 [mm]
  rect 0.9x0.75 smd: 1(-0.021,-1.593) 2(-0.021,-0.111)
  silkscreen extent -0.65,-2.13 0.6,0.45
35 [mm]
  round 1 smd: 1(0.148,-0.169)

## Part data
1 2 3 4 5 6 J601 U603 U610 U611 U612 U613 U619 U620 U621: library part NC_
C500 C501 C502 C503 C504 C505 C506 C507 C601 C603 C604 C605 C606 C608 C609 C610 C611 C612 C613 C614 C615 C616 C618 C619 C620 C621 C624 C625 C626 C628 C630 C631 C632 C634 C635 C636 C637 C638 C639 C644 C645 C646 C647 C648 C650 C653 C655 C656 C657 C660 C664 C665 C666 C667 C670 C671 C672 C673 C674 C675 C676 C681 C684 C687 C688 C689 C694 C695 C699 C700 C802 C803 C804 C816 C817 C818 C819 C820 C821 C822 C823 C824 C826 C827: library part CAP, "Capacitor"
D500 D600 D601 D603 D604 D605 D606 D614 D615 D617 D621: library part DIODE_SMD, "Diode"
D501 D602 D607 D608 D609 D611 D612 D613 D618 D619 D620 D623: library part BAV99_C7420336
D502 D504 D622: library part BZX84-C6V2
ID1 ID3 ID6: library part MARK_
J600 J603 J604: library part "14P单排针 _"
LB600: library part 680NH_
LB602 LB603: library part INDUCTOR1
Q500 Q501 Q603 Q604 Q605: library part NPN
R500 R501 R502 R503 R504 R505 R506 R600 R601 R602 R603 R604 R605 R606 R607 R608 R609 R610 R611 R612 R613 R617 R618 R619 R620 R621 R622 R623 R624 R625 R626 R627 R630 R631 R634 R635 R640 R641 R644 R645 R646 R647 R648 R649 R651 R654 R655 R659 R665 R666 R669 R670 R674 R675 R677 R678 R679 R680 R682 R683 R684 R689 R690 R691 R693 R695 R696 R701 R703 R705 R706 R711 R712 R713 R716 R717 R720 R721 R802 R803 R804 R805 R806 R807 R808 R809 R810 R811 R812 R813 R821 R822 R835 R836 R837 R838 R839 R840 R841 R842: library part RES1
T600: library part SMD09H1722R_
T601: library part EFD12-390-A_
T602: library part SDCW2012-2-900TF_
TP0 TP1 TP2 TP3 TP4 TP5 TP6 TP7 TP8 TP9 TP10 TP11 TP12 TP13 TP14 TP15 TP16 TP17 TP18 TP19 TP20 TP21 TP22 TP23 TP24 TP25 TP26 TP27 TP28 TP29 TP30 TP31 TP32 TP33 TP34 TP35 TP36: library part TP_
U601: library part TL431AC, "Schottky Diode"
U602: library part NC__1
U605: library part M24256-BWMN6TP(42568WP)_
U607: library part UCC27324DGNR
U615 U622: library part RY3421-sot23-6
U617: library part AAOGAJ_
U618: library part SN74LVC08ADR
X1: library part T120（12.00MHz)_

## Free pads (board coordinates)
  round 137.79 on Keep-Out: 4(49181.06,49511.55) 5(50836.48,49511.97)

## Via types
v1: diameter 27.56, hole 15.75, Top Layer to Bottom Layer, 267 vias
v2: diameter 25, hole 15.75, Top Layer to Bottom Layer, 7 vias
v3: diameter 24, hole 15.75, Top Layer to Bottom Layer, 4 vias